# EAGLE board T08-TxClicker (EAGLE 7.1.0)
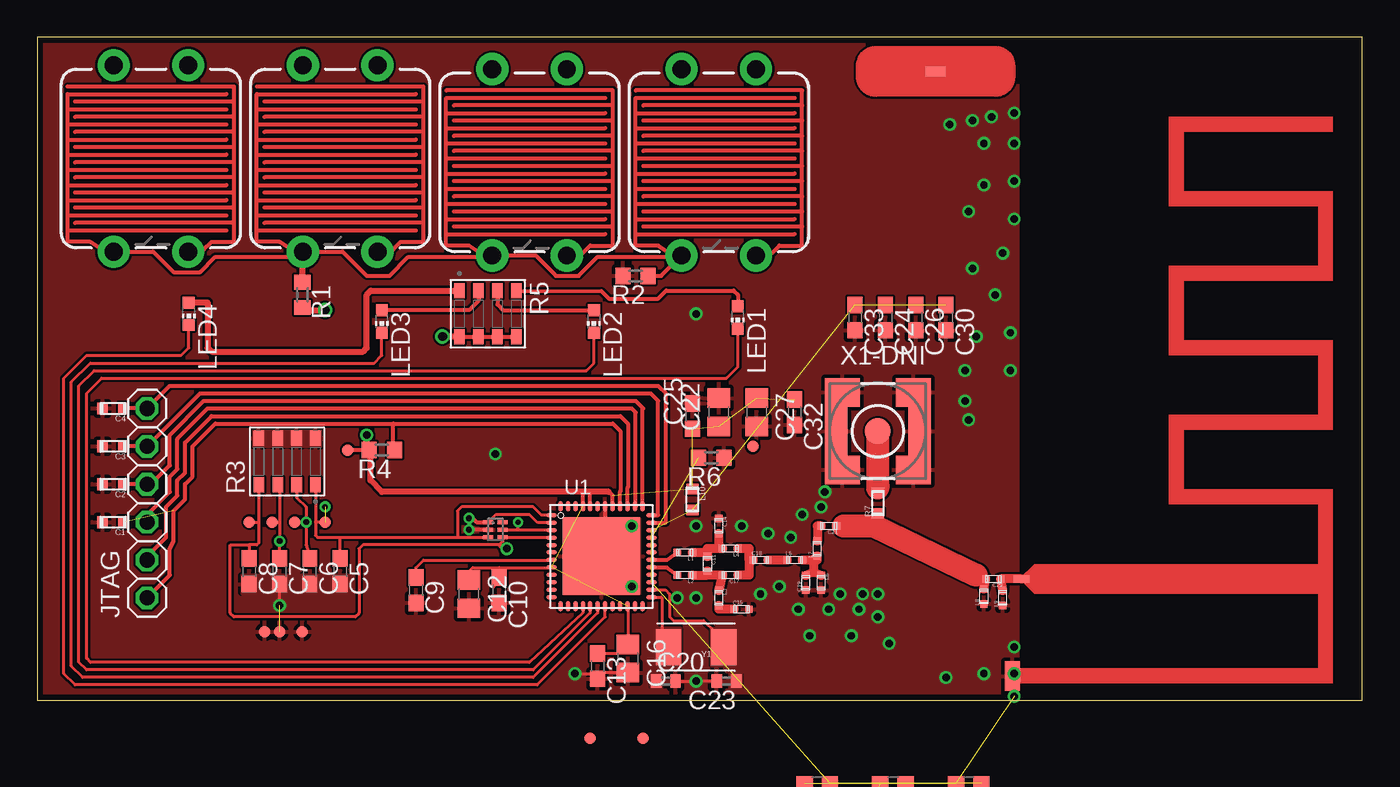
[diagram p0: board, top side]
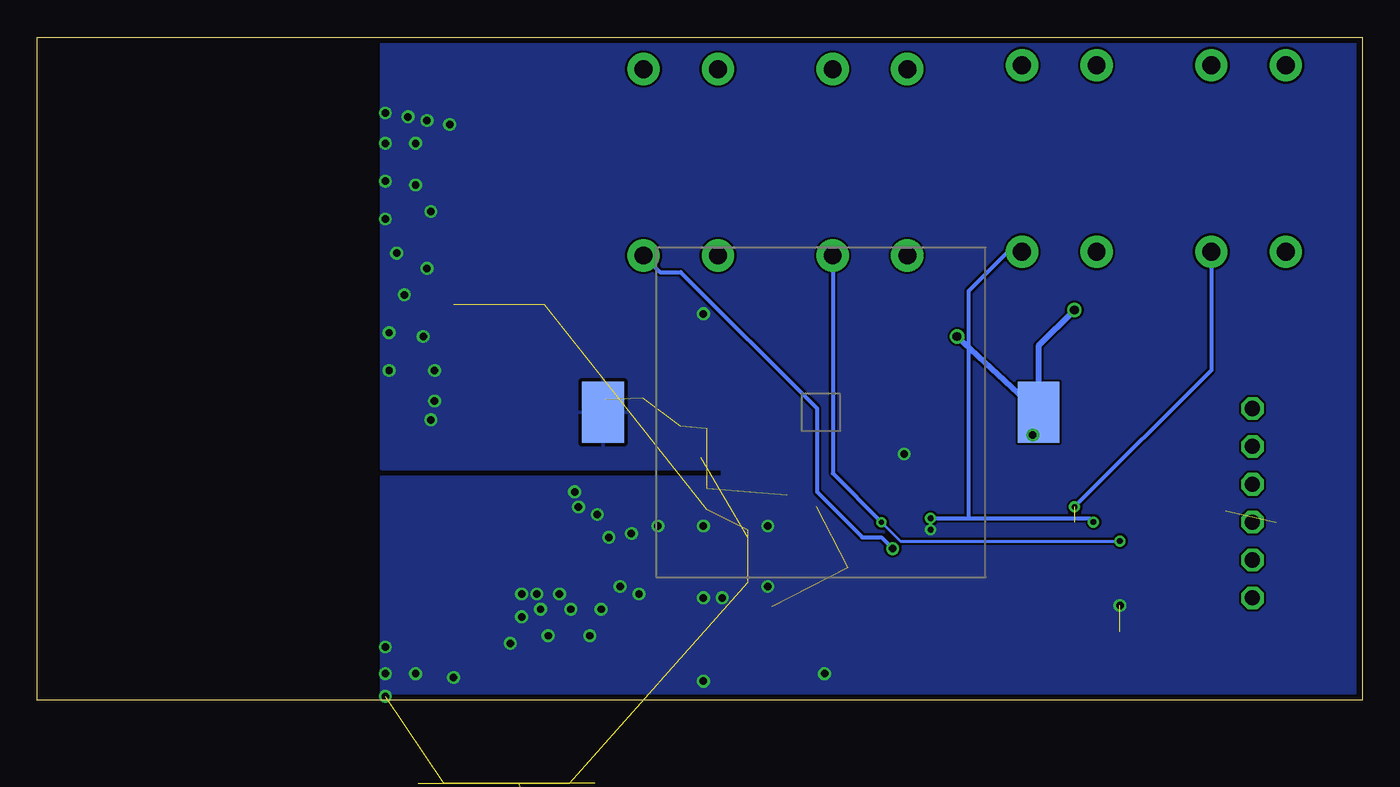
[diagram p1: board, bottom side, seen from below]

Size 88.88 x 44.45 mm. Coordinates in mm from the lower left corner, seen from the top.
Outline: 0,0 88.88,0 88.88,44.45 0,44.45 0,0
Copper layers (1*16): Top 0.0356mm / dielectric 1.5011mm / Bottom 0.0356mm
Design rules "OSH-Park-2-layer": minimum track width 6mil, minimum drill 13mil, track to track 6mil, track to pad 6mil, pad to pad 6mil, via to via 6mil, smd to smd 6mil, copper to edge 15mil, drill to drill 6mil, minimum pad ring 7mil, minimum via ring 7mil, stop-mask expansion 3mil, vias tented up to drill 0mil, thermal gap 10mil

## Footprints (pad centres in the part's own frame; a part is rotated, then mirrored left to right if it is on the bottom)
C0603 = smd 0.7 x 0.8: 1 -0.7,0; 2 0.7,0
C0603' = smd 1.1 x 1: 1 -0.85,0; 2 0.85,0
C0402 = smd 0.5 x 0.5: P$1 -0.5,0; P$2 0.5,0
C0805 = smd 1.3 x 1.5: 1 -0.95,0; 2 0.95,0
C0402' = smd 0.7 x 0.9: 1 -0.65,0; 2 0.65,0
5X-TVS = smd 0.254 x 0.66: 1 -0.508,-0.483; 2 0,-0.483; 3 0.508,-0.483; 4 0.508,0.483; 5 0,0.483; 6 -0.508,0.483
STARBOARD_GROUND_SMALL2 = smd 0.635 x 1.27: GROUND 0,5.271
1X06 = drill 1.016 octagon: 1 -6.35,0; 2 -3.81,0; 3 -1.27,0; 4 1.27,0; 5 3.81,0; 6 6.35,0
L0402 = smd 0.5 x 0.5: P$1 -0.5,0; P$2 0.5,0
L0603 = smd 0.7 x 0.8: 1 -0.7,0; 2 0.7,0
CHIP-LED0603 = smd 0.8 x 0.8: A 0,-0.75; C 0,0.75
R0603 = smd 1 x 1.1: 1 -0.85,0; 2 0.85,0
2012(4_RES) = smd 1 x 0.71: 1 -1.55,-1.905; 2 1.55,-1.905; 3 -1.55,-0.635; 4 1.55,-0.635; 5 -1.55,0.635; 6 1.55,0.635; 7 -1.55,1.905; 8 1.55,1.905
R0603' = smd 0.7 x 0.8: 1 -0.675,0; 2 0.675,0
TACTILE-PTH-12MM = drill 1.2 pad 2.159: 1 6.25,-2.5; 2 -6.25,-2.5; 3 6.25,2.5; 4 -6.25,2.5
PAD.03X.03 = smd 0.762 x 0.762: P$1 0,0
RGZ48 = smd 0.7 x 0.3: 1 -3.35,2.75; 2 -3.35,2.25; 3 -3.35,1.75; 4 -3.35,1.25; 5 -3.35,0.75; 6 -3.35,0.25; 7 -3.35,-0.25; 8 -3.35,-0.75; 9 -3.35,-1.25; 10 -3.35,-1.75; 11 -3.35,-2.25; 12 -3.35,-2.75; 25 3.35,-2.75; 26 3.35,-2.25; 27 3.35,-1.75; 28 3.35,-1.25; 29 3.35,-0.75; 30 3.35,-0.25; 31 3.35,0.25; 32 3.35,0.75; 33 3.35,1.25; 34 3.35,1.75; 35 3.35,2.25; 36 3.35,2.75 | smd 0.3 x 0.7: 13 -2.75,-3.35; 14 -2.25,-3.35; 15 -1.75,-3.35; 16 -1.25,-3.35; 17 -0.75,-3.35; 18 -0.25,-3.35; 19 0.25,-3.35; 20 0.75,-3.35; 21 1.25,-3.35; 22 1.75,-3.35; 23 2.25,-3.35; 24 2.75,-3.35; 37 2.75,3.35; 38 2.25,3.35; 39 1.75,3.35; 40 1.25,3.35; 41 0.75,3.35; 42 0.25,3.35; 43 -0.25,3.35; 44 -0.75,3.35; 45 -1.25,3.35; 46 -1.75,3.35; 47 -2.25,3.35; 48 -2.75,3.35 | smd 5.2 x 5.2: TP 0,0
CR2032-SNAPDRAGON = smd 2.794 x 4.064: V+ 14.605,0; V- -14.605,0
PCB_ANTENNA_915MHZ = smd 0.5 x 1: ANT 0,0.37 | smd 2 x 1: GPLANE 6.51,-0.23
SMA-SMD = smd 1.73 x 1.73: 1 0,0 | smd 2.35 x 1.9: 2@1 -2.375,2.6; 2@2 -2.375,-2.6; 2@3 2.375,-2.6; 2@4 2.375,2.6 | smd 1.5 x 3.4: 2@5 -2.8,0; 2@6 2.8,0
CRYSTAL-TXC-7A = smd 1.7 x 2.4: P$1 1.85,0; P$2 -1.85,0

## Placement (x,y rotation side)
C1  2nF  [C0603]  5.08,11.94 180 top
C2  2pF  [C0603]  5.08,14.48 180 top
C3  2pF  [C0603]  5.08,17.02 180 top
C4  2pF  [C0603]  5.08,19.56 180 top
C5  DNI  [C0603']  20.32,8.64 270 top
C6  DNI  [C0603']  18.29,8.64 270 top
C7  DNI  [C0603']  16.26,8.64 270 top
C8  DNI  [C0603']  14.22,8.64 270 top
C9  470nF  [C0603']  25.4,7.37 270 top
C10  100nF  [C0603']  30.99,7.37 270 top
C11  1pF  [C0402]  44.96,9.14 270 top
C12  10uF  [C0805]  28.96,7.11 270 top
C13  100nF  [C0603']  37.59,2.29 270 top
C14  1.5pF  [C0402]  45.72,11.68 270 top
C15  100pF  [C0402]  47.24,6.1 0 top
C16  10uF  [C0805]  39.62,2.79 270 top
C17  1.5pF  [C0402]  46.48,8.38 180 top
C18  1.5pF  [C0402]  48.51,9.4 0 top
C19  8.2pF  [C0402]  51.56,7.87 90 top
C20  18pF  [C0402']  42.16,1.27 0 top
C21  1.5pF  [C0402]  53.09,11.68 180 top
C22  10uF  [C0805]  45.72,19.3 90 top
C23  18pF  [C0402']  46.23,1.27 180 top
C24  100nF  [C0603']  56.9,25.65 270 top
C25  100nF  [C0603']  43.94,19.05 90 top
C26  100nF  [C0603']  58.93,25.65 270 top
C27  10uF  [C0805]  48.26,19.3 270 top
C28  100nF  [C0603']  62.48,-5.59 180 top  (outside the outline)
C29  16pF  [C0402]  64.14,8.13 180 top
C30  2pF  [C0603']  60.96,25.65 270 top
C31  100nF  [C0603']  57.4,-5.59 180 top  (outside the outline)
C32  100nF  [C0603']  50.8,19.3 270 top
C33  100nF  [C0603']  54.86,25.65 270 top
C34  2pF  [C0603']  52.32,-5.59 180 top  (outside the outline)
D1  ESDA6V1-5M6  [5X-TVS]  30.73,11.43 270 top
GND  [STARBOARD_GROUND_SMALL2]  65.53,42.16 90 top
JTAG  6pin  [1X06]  7.37,13.21 90 top
L1  12nH  [L0402]  43.43,9.91 180 top
L2  12nH  [L0402]  43.43,8.38 180 top
L3  18nH  [L0402]  45.72,6.86 270 top
L4  18nH  [L0402]  46.48,10.16 180 top
L5  15nH  [L0402]  50.8,9.4 0 top
L6  2.2nH  [L0402]  52.58,7.87 270 top
L7  15nH  [L0402]  52.32,10.16 90 top
L8  DNP  [L0402]  63.5,6.96 90 top
L9  5.6nH  [L0402]  64.77,6.86 90 top
L10  ~200nH  [L0603]  43.94,13.46 270 top
LED1  Blue  [CHIP-LED0603]  46.99,25.65 180 top
LED2  Green  [CHIP-LED0603]  37.34,25.4 180 top
LED3  Red  [CHIP-LED0603]  23.11,25.4 180 top
LED4  Yellow  [CHIP-LED0603]  10.16,25.91 180 top
R1  10k  [R0603]  17.78,27.18 270 top
R2  DNI  [R0603]  40.13,28.45 180 top
R3  10MEG  [2012(4_RES)]  16.76,16 90 top
R4  47k  [R0603]  23.11,16.76 180 top
R5  3.3k  [2012(4_RES)]  30.23,25.91 270 top
R6  56k  [R0603]  45.21,16.26 180 top
R7  0-DNI  [R0603']  56.39,13.21 90 top
S1  TOUCHPAD_SWITCH_COMBOSWITC_TOUCHPAD  [TACTILE-PTH-12MM]  7.62,36.32 270 top
S2  TOUCHPAD_SWITCH_COMBOSWITC_TOUCHPAD  [TACTILE-PTH-12MM]  20.32,36.32 270 top
S3  TOUCHPAD_SWITCH_COMBOSWITC_TOUCHPAD  [TACTILE-PTH-12MM]  33.02,36.07 270 top
S4  TOUCHPAD_SWITCH_COMBOSWITC_TOUCHPAD  [TACTILE-PTH-12MM]  45.72,36.07 270 top
TP1  TEST-POINT3  [PAD.03X.03]  17.78,4.57 270 top
TP2  TEST-POINT3  [PAD.03X.03]  16.26,4.57 270 top
TP3  TEST-POINT3  [PAD.03X.03]  15.24,4.57 270 top
TP4  TEST-POINT3  [PAD.03X.03]  19.3,11.94 270 top
TP5  TEST-POINT3  [PAD.03X.03]  17.27,11.94 270 top
TP6  TEST-POINT3  [PAD.03X.03]  15.75,11.94 270 top
TP7  TEST-POINT3  [PAD.03X.03]  14.22,11.94 270 top
TP8  TEST-POINT3  [PAD.03X.03]  20.83,16.76 270 top
TP9  TEST-POINT3  [PAD.03X.03]  48.51,-10.92 270 top  (outside the outline)
TP10  TEST-POINT3  [PAD.03X.03]  40.64,-2.54 270 top
TP11  TEST-POINT3  [PAD.03X.03]  37.08,-2.54 270 top
TP12  TEST-POINT3  [PAD.03X.03]  40.89,-10.92 270 top  (outside the outline)
TP13  TEST-POINT3  [PAD.03X.03]  38.35,-10.92 270 top  (outside the outline)
TP14  TEST-POINT3  [PAD.03X.03]  35.81,-10.92 270 top  (outside the outline)
TP15  TEST-POINT3  [PAD.03X.03]  33.27,-10.92 270 top  (outside the outline)
TP16  TEST-POINT3  [PAD.03X.03]  30.73,-10.92 270 top  (outside the outline)
TP17  TEST-POINT3  [PAD.03X.03]  28.19,-10.92 270 top  (outside the outline)
TP18  TEST-POINT3  [PAD.03X.03]  48.01,17.02 90 top
U1  CC430F513X---RGZ48  [RGZ48]  37.85,9.65 0 top
U$5  CR2032-SNAPDRAGONCR2032  [CR2032-SNAPDRAGON]  36.32,19.3 0 bottom
U$6  PCB_ANTENNA_915MHZOSHP  [PCB_ANTENNA_915MHZ]  65.65,8.13 270 top
X1-DNI  SMA-SMD  [SMA-SMD]  56.39,18.03 0 top
Y1  26MHz  [CRYSTAL-TXC-7A]  44.2,3.56 180 top

## Library data of the parts
C1-C4 C11 C14 C15 C17-C19 C21 C29 L1-L10 R7 = rcl-amber
C5-C10 C12 C13 C16 C20 C22-C28 C30-C34 R1 R2 R4 R6 = rcl
D1 = TVS
GND = SparkFun-Connectors
JTAG LED1-LED4 = adafruit
R3 R5 = QuadResistor
S1-S4 = SparkFun-Electromechanical--edited
TP1-TP18 = SparkFun-Passives
U1 = TI_MSP430_v16_truncated
U$5 = CR2032-SnapDragon
U$6 = PCB_Antenna_915MHz-halseth
X1-DNI = con-coax; OC_FARNELL: unknown; OC_NEWARK: unknown
Y1 = SparkFun-FreqCtrl

## Nets
ANTENNA: C29.P$1 L9.P$2 U$6.ANT
GND: C1.2 C2.2 C3.2 C4.2 C5.2 C6.2 C7.2 C8.2 C9.2 C10.2 C12.2 C13.2 C14.P$1 C15.P$2 C16.2 C19.P$1 C20.2 C22.2 C23.2 C24.2 C25.2 C26.2 C27.2 C28.2 C30.2 C31.2 C32.2 C33.2 C34.2 D1.2 L6.P$2 L8.P$1 L9.P$1 R2.2 R3.2 R3.4 R3.6 R3.8 R6.1 TP1.P$1 TP2.P$1 TP3.P$1 U1.42 U1.TP U$5.V- U$6.GPLANE X1-DNI.2@1 X1-DNI.2@2 X1-DNI.2@3 X1-DNI.2@4 X1-DNI.2@5 X1-DNI.2@6
N$1: C11.P$2 C17.P$2 L2.P$1 L3.P$1
N$2: C11.P$1 C14.P$2 L1.P$1 L4.P$2
N$3: C17.P$1 C18.P$1 L4.P$1
N$4: C15.P$1 L3.P$2
N$5: C18.P$2 L5.P$1
N$6: C19.P$2 L5.P$2 L6.P$1 L7.P$1
N$8: C21.P$2 L7.P$2
N$9: C24.1 C26.1 C28.1 C30.1 C31.1 C33.1 C34.1 L10.2 U1.27 U1.28 U1.31 U1.32 U1.34
N$10: R7.2 X1-DNI.1
N$12: C21.P$1 C29.P$2 L8.P$2 R7.1
N$13: LED1.A R5.7
N$14: LED2.A R5.5
N$16: LED3.A R5.3
N$17: LED4.A R5.1
N$20: R1.1 R2.1 S1.1 S2.1 S3.1 S4.1
P1.0: U1.13
P1.1: U1.12
P1.2: U1.11
P1.3: U1.10
P1.4: U1.9
P1.5: U1.6
P1.6: U1.5
P1.7: C8.1 D1.4 R3.7 S4.3 TP7.P$1 U1.4
P2.0: C7.1 D1.5 R3.5 S3.3 TP6.P$1 U1.3
P2.1: C6.1 D1.1 R3.3 S2.3 TP5.P$1 U1.2
P2.2: C5.1 D1.3 R3.1 S1.3 TP4.P$1 U1.1
P2.3: U1.48
P2.4: U1.47
P2.5: U1.46
P2.6: U1.24
P2.7: U1.23
P3.0: U1.21
P3.1: U1.20
P3.2: LED4.C U1.19
P3.3: LED3.C U1.18
P3.4: LED2.C U1.17
P3.5: LED1.C U1.16
P3.6: U1.15
P3.7: U1.14
P5.1: U1.43
PJ.0/TDO: C4.1 JTAG.6 U1.35
PJ.1/TDI/TCLK: C3.1 JTAG.5 U1.36
PJ.2/TMS: C2.1 JTAG.4 U1.37
PJ.3/TCK: JTAG.3 U1.38
R_BIAS: R6.2 U1.33
RF_N: L1.P$2 U1.30
RF_P: L2.P$2 U1.29
RF_XIN: C20.1 U1.25 Y1.P$1
RF_XOUT: C23.1 U1.26 Y1.P$2
RST/NMI/SBWTDIO: C1.1 JTAG.1 R4.1 U1.40
TEST/SBWTCK: JTAG.2 U1.39
VCC: C10.1 C12.1 C13.1 C16.1 C22.1 C25.1 C27.1 C32.1 L10.1 R1.2 R4.2 R5.2 R5.4 R5.6 R5.8 TP8.P$1 U1.8 U1.22 U1.41 U1.44 U1.45 U$5.V+
VCORE: C9.1 U1.7

## Tracks (layer width: path | path; a pad name or v marks a point on that pad's centre or on a via)
ANTENNA
  Top 0.61: L9.P$2 C29.P$1 U$6.ANT
GND  (via drill 0.38, 0.5, 0.5 pad 0.25)  (11 unrouted)
  Top 0.203: C23.2 v44.2,1.27 C20.2 | C16.2 38,1.84 C13.2 37.25,1.78 v36.07,1.78 | v16.26,6.35 C7.2
  Top 0.254: D1.2 v28.96,11.43 | U1.42 38.1,11.18 U1.TP
  other vias: 64.26,27.18 54.86,-10.41 54.61,-12.7 56.9,-13.46 55.37,-15.24 56.9,-15.49 56.9,-17.53 58.17,-18.54 52.83,13.97 52.58,12.95 51.31,12.45 50.55,10.92 49.02,11.18 47.24,11.68 44.2,11.68 44.2,6.86 42.93,6.86 48.51,7.11 49.78,7.62 51.05,6.1 53.09,6.1 53.85,7.11 55.12,6.1 55.37,7.11 57.15,3.81 56.39,7.11 56.39,5.59 54.61,4.32 65.53,3.56 51.82,4.32 63.5,1.78 60.96,1.52 65.53,1.78 65.53,0.25 64.01,39.12 62.74,38.86 61.21,38.61 63.5,37.34 65.53,37.34 65.53,39.37 65.53,34.8 63.5,34.54 62.48,32.77 65.53,32.26 64.77,29.97 62.74,28.96 62.99,24.38 65.28,24.64 65.28,22.1 62.23,22.1 62.23,20.07 62.48,18.8 44.2,25.91 30.73,16.51 39.88,7.62 39.88,11.68
  pour Bottom: 0,0 65.79,0 65.79,14.99 42.93,14.99 42.93,15.49 65.79,15.49 65.79,44.45 0,44.45
  pour Top (no thermals): 14.48,17.02 19.05,17.02 19.05,18.03 14.48,18.03
  pour Top (no thermals): 21.08,8.38 13.72,8.38 13.72,7.11 21.08,7.11
  pour Top (no thermals): 40.39,12.19 40.39,7.11 35.31,7.11
  pour Top: 0,0 65.79,0 65.79,44.45 0,44.45
N$1
  Top 0.61: 44.96,8.38 C17.P$2 45.78,7.56 L3.P$1 | L2.P$1 44.96,8.38 | 44.96,8.38 C11.P$2
N$2
  Top 0.61: C14.P$2 45.72,10.16 L4.P$2 44.96,10.16 C11.P$1 44.96,9.91 L1.P$1
N$3
  Top 0.61: C18.P$1 47.75,9.4 | 47.75,9.4 47.75,10.16 L4.P$1 | 47.75,9.4 47.75,8.38 C17.P$1
N$4
  Top 0.61: C15.P$1 45.72,6.1 L3.P$2
N$5
  Top 0.61: L5.P$1 C18.P$2
N$6
  Top 0.61: L6.P$1 52.07,8.57 | 52.07,8.57 C19.P$2 | 52.07,8.57 52.07,9.46 L7.P$1 52.32,9.4 L5.P$2
N$8
  Top 0.61: C21.P$2 52.32,11.68 L7.P$2
N$9  (12 unrouted)
N$10
  Top 0.61: R7.2 56.39,14.22 | 56.39,17.78 X1-DNI.1
  Top 1.549: 56.39,14.22 56.39,14.48 56.39,17.78
N$12
  Top 0.406: C21.P$1
  Top 0.61: C21.P$1 54.1,11.68 | 56.13,11.68 56.39,11.68 | 56.39,11.68 R7.1 | 56.39,11.68 C29.P$2 L8.P$2
  Top 1.549: 54.1,11.68 56.13,11.68 62.99,8.38
N$13
  Top 0.254: R5.7 37.85,27.43 38.35,26.92 41.66,26.92 42.19,27.46 46.71,27.46 46.99,27.18 LED1.A
N$14
  Top 0.254: R5.5 30.86,26.54 31.24,26.16 37.33,26.16 LED2.A
N$16
  Top 0.254: R5.3 29.59,26.8 28.96,26.16 23.13,26.16 LED3.A
N$17
  Top 0.406: LED4.A 10.17,26.67 11.43,26.67 11.43,23.62 11.68,23.37 21.84,23.37 22.1,23.62 22.1,27.18 22.38,27.46 R5.1
N$20
  Top 0.254: S2.1 17.82,29.5 | S2.1 20.47,30.07 22.1,28.45 23.62,28.45 24.89,29.72 30.42,29.72 S3.1 33.43,29.82 34.8,28.45 36.32,28.45 37.59,29.72 43.12,29.72 S4.1 41.85,28.45 R2.1 | S1.1 7.77,30.07 9.14,28.7 10.92,28.7 11.94,29.72 17.47,29.72 S2.1
  Top 0.406: R1.1 17.82,29.5
P1.7  (via drill 0.5 pad 0.25)
  Top 0.203: U1.4 34.48,10.92 D1.4 31.22,10.64 30.99,10.41 21.84,10.41 21.59,10.16 21.59,5.84 21.34,5.59 13.21,5.59 12.95,5.84 12.95,10.41 14.22,10.41 | 14.22,10.41 14.73,10.41 14.86,10.54 14.86,11.94 | 14.22,10.41 C8.1 | R3.7 14.86,11.94 | TP7.P$1 14.86,11.94
  Top 0.254: 30.99,10.41 31.24,10.16 v31.5,10.16
  Bottom 0.254: S4.3 47.1,28.7 45.72,28.7 36.58,19.56 36.58,13.97 33.53,10.92 32.26,10.92 v31.5,10.16
P2.0  (via drill 0.33, 0.38)
  Top 0.203: 32.26,11.43 34.47,11.43 U1.3 | C7.1 16.13,9.61 16.26,9.74 v16.26,10.67 16.26,11.94 | R3.5 16.26,14.32 16.26,11.94 | D1.5 32.26,11.43 | 32.26,11.43 v32.26,11.94 | TP6.P$1 16.26,11.94
  Bottom 0.203: v32.26,11.94 30.99,10.67 v16.26,10.67
  Bottom 0.254: S3.3 35.52,15.2 v32.26,11.94
P2.1  (via drill 0.38, 0.38 pad 0.25)
  Top 0.203: v18.03,11.94 18.03,10.41 C6.1 | U1.2 33.56,11.9 33.02,12.45 30.76,12.45 D1.1 | R3.3 17.4,13.59 18.03,12.95 v18.03,11.94 | TP5.P$1 v18.03,11.94
  Top 0.254: v28.96,12.19 29.21,12.19 29.46,11.94 D1.1
  Bottom 0.254: v28.96,12.19 26.42,12.19 | 26.42,12.19 18.29,12.19 v18.03,11.94 | S2.3 23.78,30.07 26.42,27.43 26.42,12.19
P2.2  (via drill 0.38)  (1 unrouted)
  Top 0.203: U1.1 33.83,12.4 33.27,12.95 28.45,12.95 28.19,12.7 28.19,10.92 | R3.1 18.67,11.94 | 18.67,11.94 18.67,11.05 18.8,10.92 20.32,10.92 | 28.19,10.92 D1.3 | 20.32,10.92 28.19,10.92 | C5.1 20.32,10.92 | TP4.P$1 18.67,11.94
  Bottom 0.254: S1.3 10.12,22.14 v19.3,12.95
P3.2
  Top 0.203: U1.19 38.1,5.59 33.53,1.02 2.54,1.02 1.78,1.78 1.78,21.59 3.3,23.11 9.65,23.11 10.16,23.62 LED4.C
P3.3
  Top 0.203: U1.18 37.6,5.85 33.27,1.52 3.05,1.52 2.29,2.29 2.29,21.34 3.56,22.61 22.61,22.61 23.11,23.11 LED3.C
P3.4
  Top 0.203: U1.17 37.1,5.85 33.27,2.03 3.3,2.03 2.79,2.54 2.79,21.08 3.81,22.1 36.83,22.1 37.34,22.61 LED2.C
P3.5
  Top 0.203: 36.58,6.28 U1.16 36.6,5.86 33.02,2.54 3.56,2.54 3.3,2.79 3.3,20.57 4.32,21.59 46.23,21.59 46.99,22.35 LED1.C
PJ.0/TDO
  Top 0.254: U1.35 42.13,11.9 42.16,11.94 42.16,20.57 41.66,21.08 8.89,21.08 JTAG.6 C4.1
PJ.1/TDI/TCLK
  Top 0.254: U1.36 41.66,12.4 41.66,20.07 41.15,20.57 10.92,20.57 JTAG.5 C3.1
PJ.2/TMS
  Top 0.254: U1.37 40.6,19.6 | C2.1 JTAG.4 7.62,14.48 8.89,15.75 8.89,17.78 11.18,20.07 40.13,20.07 40.6,19.6 | 40.6,19.6 40.64,19.56
PJ.3/TCK
  Top 0.254: U1.38 40.13,13 40.13,19.3 39.88,19.56 11.43,19.56 9.4,17.53 9.4,15.49 8.89,14.99 8.89,13.97 7.37,12.45 JTAG.3
R_BIAS  (1 unrouted)
RF_N
  Top 0.254: U1.30 42.23,9.4 L1.P$2
RF_P
  Top 0.254: U1.29 42.21,8.9 L2.P$2
RF_XIN
  Top 0.203: U1.25 41.87,6.9 41.91,6.86 41.91,3.81
  pour Top (no thermals): 41.91,0.76 41.91,2.29 43.18,2.29 43.18,4.83 41.15,4.83 41.15,0.76
RF_XOUT
  Top 0.203: U1.26 42.13,7.4 42.42,7.11 42.42,5.59 42.67,5.33 44.7,5.33 45.47,4.57
  pour Top (no thermals): 46.48,0.76 46.48,2.29 45.21,2.29 45.21,4.83 47.24,4.83 47.24,0.76
RST/NMI/SBWTDIO  (1 unrouted)
  Top 0.254: U1.40 39.1,13.99 39.12,14.01 39.12,18.03 38.61,18.54 23.88,18.54 | JTAG.1 8.89,8.38 8.89,10.16 9.14,10.67 9.14,12.7 9.91,13.46 9.91,14.48 10.41,14.99 10.41,17.02 11.94,18.54 23.88,18.54 | R4.1 23.88,16.85 23.88,18.54
TEST/SBWTCK
  Top 0.254: U1.39 39.6,14.25 39.62,14.28 39.62,18.54 39.12,19.05 11.68,19.05 9.91,17.27 9.91,15.24 9.4,14.73 9.4,13.72 8.64,12.95 8.64,10.92 7.37,9.65 JTAG.2
VCC  (via drill 0.5 pad 0.3, 0.6)  (7 unrouted)
  Top 0.203: 30.99,8.89 C10.1 30.58,7.55 | 30.99,8.89 29.21,8.89 28.96,8.64 C12.1 | 30.99,8.89 34.48,8.89 U1.8 | U1.22 39.62,6.27 C16.1 39.02,3.14 C13.1
  Top 0.254: R4.2 TP8.P$1 | U1.41 38.6,13.73 38.35,13.97 | U1.44 37.1,13.96 37.08,13.97 | U1.45 36.6,13.95 36.58,13.97 | R5.2 R5.4 R5.6 R5.8
  Top 0.406: 38.35,13.97 37.08,13.97 36.58,13.97 23.11,13.97 22.35,14.73 22.35,16.68 R4.2 22.1,16.93 v22.1,17.78 | R5.2 27.2,24.36 v27.18,24.38 | R1.2 17.95,26.16 v19.3,26.16
  Bottom 0.406: v27.18,24.38 U$5.V+ | v19.3,26.16 21.72,23.75 U$5.V+ | v22.1,17.78 21.72,18.16 U$5.V+
VCORE
  Top 0.203: C9.1 25.4,8.89 25.91,9.4 U1.7

## Text on the board
tDocu: 1 | 36 | 12 | 24